# EAGLE board SymBA (EAGLE 9.6.2)
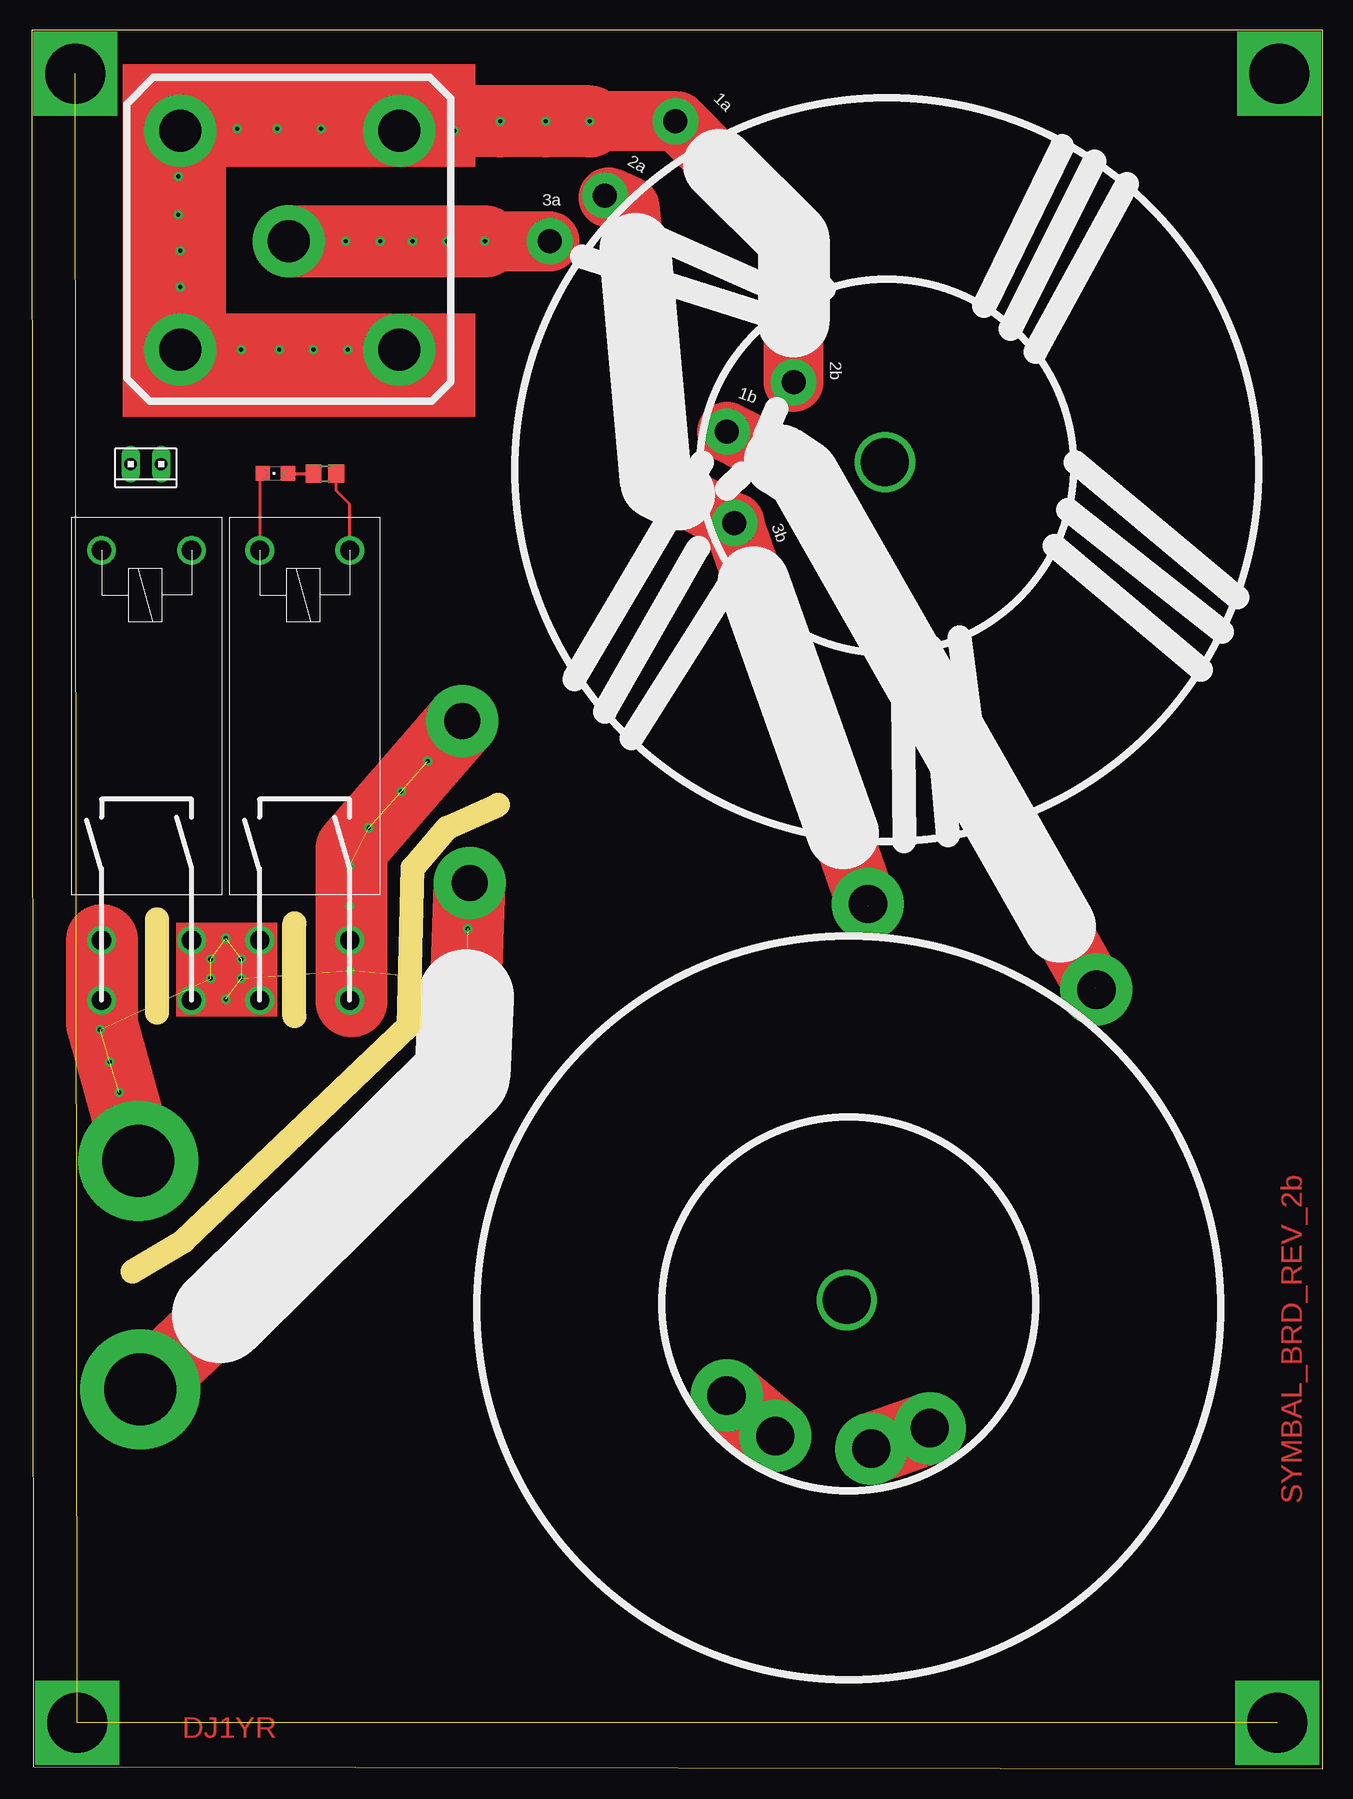
[diagram p0: board, top side]
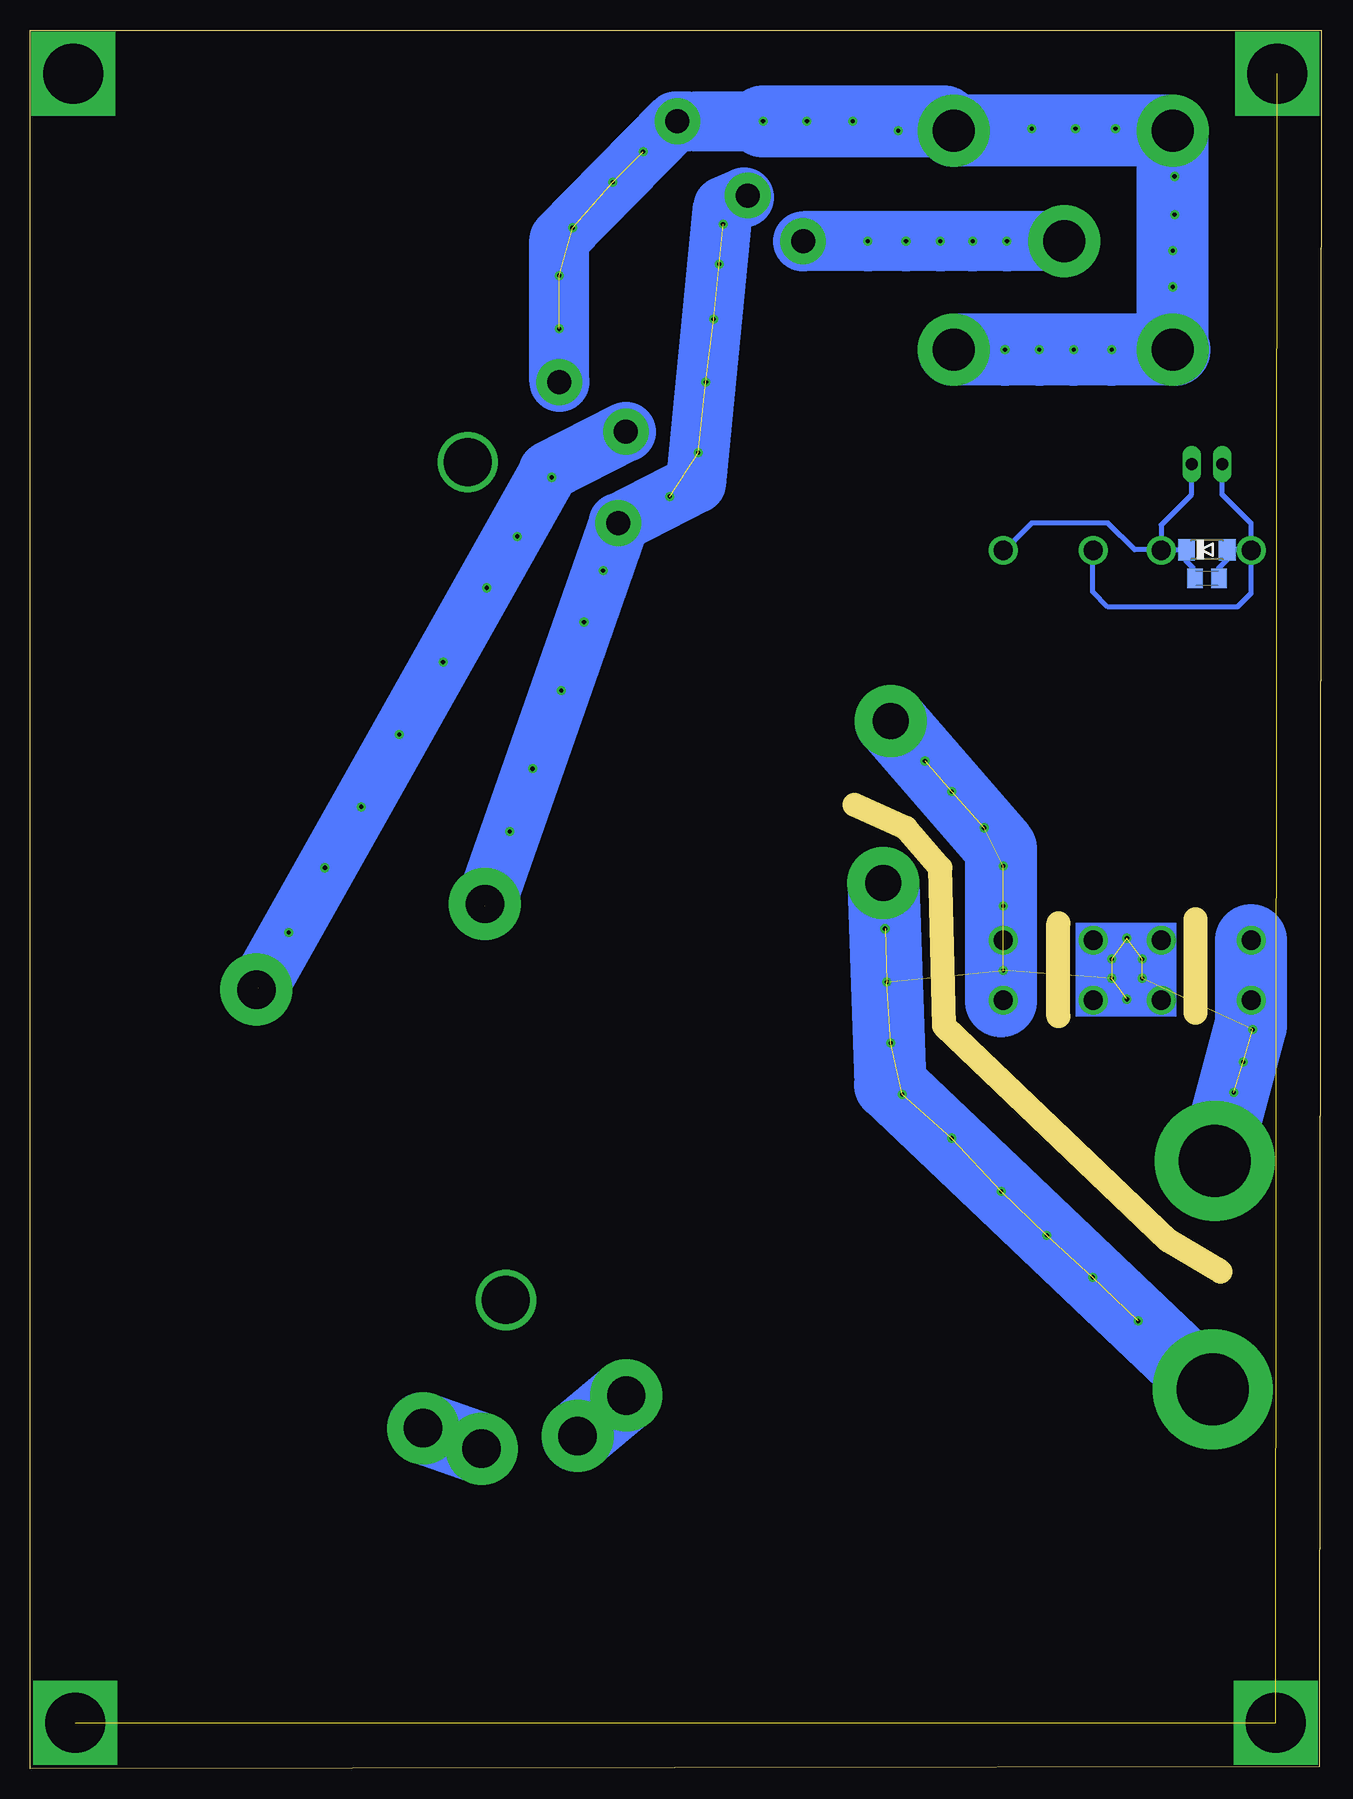
[diagram p1: board, bottom side, seen from below]

Size 107.61 x 144.92 mm. Coordinates in mm from the lower left corner, seen from the top.
Outline: 0.16,0.16 107.6,0 107.6,144.92 0,144.92 0.16,0.16
Copper layers (1*16): Top 0.035mm / dielectric 1.5mm / Bottom 0.035mm
Design rules "default *": minimum track width 6mil, minimum drill 0.35mm, track to track 6mil, track to pad 6mil, pad to pad 6mil, via to via 6mil, smd to smd 6mil, copper to edge 0mil, drill to drill 6mil, minimum pad ring 10mil, minimum via ring 8mil, stop-mask expansion 4mil, vias tented up to drill 0mil, thermal gap 10mil
Milling: 7 lines

## Footprints (pad centres in the part's own frame; a part is rotated, then mirrored left to right if it is on the bottom)
CHIPLED_0805 = smd 1.2 x 1.2: A 0,-1.05; C 0,1.05
10X02MTA = drill 1.016 long: 1 1.27,0; 2 -1.27,0
C0805K = smd 1.3 x 1.6: 1 -1,0; 2 1,0
MINIMELF = smd 1.4 x 1.8: A 1.7,0; C -1.7,0
FINDER45.91.7.024.0310 = drill 1.6: P$1 2.75,2.5; P$2 2.75,10; P$3 35.25,2.5; P$4 35.25,10; P$5 40.25,2.5; P$6 40.25,10
R0805 = smd 1.3 x 1.5: 1 -0.95,0; 2 0.95,0

## Placement (x,y rotation side)
E$1  [CHIPLED_0805]  20.32,107.95 90 top
E$2  [10X02MTA]  9.53,108.74 180 top
E$3  [C0805K]  9.53,99.22 0 bottom
E$4  [MINIMELF]  9.53,101.6 0 bottom
E$5  [FINDER45.91.7.024.0310]  3.33,104.3 270 top
E$6  [FINDER45.91.7.024.0310]  16.51,104.3 270 top
E$7  [R0805]  24.45,107.95 0 top

## Library data of the parts
E$1 = led
E$2 = con-amp
E$3 E$7 = rcl
E$4 = diode
E$5 E$6 = Finder 45.91.7.024.0310

## Nets
S$4: E$2.1

## Tracks (layer width: path | path; a pad name or v marks a point on that pad's centre or on a via)
S$1  (via drill 2 pad 3.81)  (1 unrouted)
  Top 5: 64.4,108.13 v57.94,111.44 | 88.58,65.09 64.29,108.11
  Bottom 5: v57.94,111.44 64.4,108.13 64.45,107.95 88.58,65.09
S$2  (via drill 6 pad 10)
  Bottom 6: v8.89,50.64 5.87,61.91 5.87,69.06
S$3  (via drill 6 pad 10)
  other vias: 9.05,31.59
S$4
  Bottom 0.406: 8.57,99.22 8.57,100.01 7.78,100.81 7.78,101.6 | E$2.1 8.25,106.2 5.87,103.82 5.87,101.6 | 5.87,101.6 7.78,101.6 | 7.78,101.6 7.94,101.6 | 5.87,101.6 5.87,97.95 6.98,96.84 17.78,96.84 19.05,98.11 19.05,101.6
S$5
  Bottom 0.406: 10.64,99.22 10.64,100.01 11.27,100.65 11.27,101.6 | 10.79,108.74 10.79,106.2 13.33,103.66 13.33,101.6 | 13.33,101.6 11.27,101.6 | 11.27,101.6 11.11,101.6 | 13.33,101.6 15.56,101.6 17.78,103.82 24.13,103.82 26.51,101.44
S$6  (via drill 4 pad 5)
  other vias: 71.12,108.9
S$7  (via drill 3.2 pad 6)
  other vias: 88.74,64.93
S$8  (via drill 0.35, 2 pad 3.81, 3.5 pad 6)
  Top 5: v63.5,115.57 63.5,127.48 53.82,137.32 v46.51,137.32
  Top 6: v30.64,118.27 v26.35,118.27 v23.49,118.27 v20.64,118.27 v17.46,118.27 v12.38,118.27 v12.38,123.51 v12.38,126.52 v12.38,136.52 v30.64,136.52 31.43,137.32 v39.05,137.32 v42.86,137.32 v46.51,137.32
  Bottom 5: 52.86,137.32 53.82,137.32 63.5,127.48 v63.5,115.57 | 52.07,137.32 v46.51,137.32
  Bottom 6: v12.38,136.52 v30.64,136.52 31.43,137.32 v39.05,137.32 v42.86,137.32 v46.51,137.32 | v12.38,118.27 v12.38,123.51 v12.38,126.52 12.38,136.37 | 12.22,118.27 v17.46,118.27 v20.64,118.27 v23.49,118.27 v26.35,118.27 v30.64,118.27
S$9  (via drill 0.35)  (5 unrouted)
  other vias: 54.29,106.05 51.91,109.7 51.28,115.57 50.64,120.81 50.16,125.41 49.85,128.75
S$10  (via drill 0.35, 2 pad 3.81, 3.5 pad 6)
  Top 5: v37.78,127.32 v43.18,127.32
  Top 6: v21.43,127.32 v26.19,127.32 v29.05,127.32 v31.75,127.32 v34.61,127.32 v37.78,127.32
  Bottom 5: v21.43,127.32 v26.19,127.32 v29.05,127.32 v31.75,127.32 v34.61,127.32 v37.78,127.32 v43.18,127.32
S$11
  Top 0.254: 19.05,101.6 19.05,107.95 19.21,107.95
S$13  (via drill 3 pad 6)
  Top 6: 8.89,31.27 35.93,57.01 v36.51,73.82
  Bottom 6: v36.51,73.82 35.93,57.01 9.05,31.43
S$15  (via drill 3 pad 6)
  Top 6: 26.67,63.98 26.67,76.68 v35.88,87.31
  Bottom 6: 26.67,63.98 26.67,76.68 v35.88,87.31
S$16
  Top 6: 9.05,50.64 5.87,62.07 5.87,69.06
S$17  (via drill 0.35)  (23 unrouted)
  other vias: 7.3,56.36 6.51,58.9 5.72,61.59 14.92,67.47 17.46,67.47 14.92,65.88 17.46,65.88 16.19,64.14 16.19,69.22 26.51,66.52 26.51,71.91 26.51,75.25 28.1,78.42 30.8,81.44 33.02,83.98 15.24,37.31 19.05,40.96 22.86,44.45 26.67,48.1 30.8,52.55 34.92,56.2 35.88,60.48 36.2,65.56 36.35,70.01
S$18
  Top 0.254: 21.27,107.95 23.49,107.95
S$19
  Top 0.254: 26.51,101.6 26.51,105.41 25.4,106.52 25.4,108.11
S$20  (via drill 4 pad 5)
  other vias: 67.94,39.05
S$26  (via drill 3.2 pad 6)
  Top 6: v61.98,27.72 v57.92,31.1
  Bottom 6: v57.92,31.1 v61.98,27.72
S$27  (via drill 3.2 pad 6)
  Top 6: v74.85,28.38 v69.98,26.66
  Bottom 6: v69.98,26.66 v74.85,28.38
S$28  (via drill 3.2 pad 6)
  Top 5: 69.69,71.91 69.53,71.91 v69.69,72.07
S$30  (1 unrouted)
  Top 5: 69.69,71.91 58.58,103.66
  Bottom 5: 58.58,103.66 69.69,71.91
S$45  (via drill 5 pad 7)  (2 unrouted)
  other vias: 103.82,3.81 3.81,3.81 3.65,141.29
S$46  (via drill 5 pad 7)
  other vias: 103.98,141.29
S$47  (via drill 0.35)
  other vias: 67.63,78.11
S$48  (via drill 0.35)
  other vias: 65.72,83.34
S$49  (via drill 0.35)
  other vias: 61.44,95.57
S$50  (via drill 0.35)  (4 unrouted)
  other vias: 56.52,134.78 59.05,132.24 62.39,128.43 63.5,124.46 63.5,120.02
S$51  (via drill 0.35)
  other vias: 63.34,89.85
S$52  (via drill 0.35)
  other vias: 86.04,69.69
S$53  (via drill 0.35)
  other vias: 83.03,75.09
S$54  (via drill 0.35)
  other vias: 80.01,80.17
S$55  (via drill 0.35)
  other vias: 76.83,86.2
S$56  (via drill 0.35)
  other vias: 73.18,92.23
S$57  (via drill 0.35)
  other vias: 69.53,98.42
S$58  (via drill 0.35)
  other vias: 66.99,102.71
S$59  (via drill 0.35)
  other vias: 64.14,107.63
S$60  (via drill 0.35)
  other vias: 59.85,99.85
S$61  (via drill 0.35)
  other vias: 12.22,129.54
S$62  (via drill 0.35)
  other vias: 12.22,132.72
S$63  (via drill 0.35)
  other vias: 17.14,136.68
S$64  (via drill 0.35)
  other vias: 20.48,136.68
S$65  (via drill 0.35)
  other vias: 24.13,136.68
S$66  (via drill 0.35)
  other vias: 35.24,136.53
S$68  (via drill 2 pad 3.81)
  Top 5: v58.58,103.82 52.07,107.16 49.85,130.17 48.1,130.97
  Bottom 5: v58.58,103.82 52.1,107.14 49.83,130.23 48.1,130.97
S$70  (via drill 2 pad 3.81)
  other vias: 53.66,137.32
S$71  (via drill 2 pad 3.81)
  other vias: 47.78,131.13
(copper drawn outside any net)
  shapes: Bottom area x1, Top area x4

## Text on the board
Top: SYMBAL_BRD_REV_2b | DJ1YR
tPlace: 1a | 2a | 3a | 2b | 1b | 3b